# Altium PCB MainBoard.PcbDoc
Units mil, origin at the board's own origin, x right, y up, seen from the top; angles counter-clockwise.
Board outline 1968.5 x 3937.01 mil, 2 copper layers (Top Layer, Bottom Layer); 49 components, 51 nets, 265 pads, 104 vias.
Unrouted connection lines stored in the file: 41.
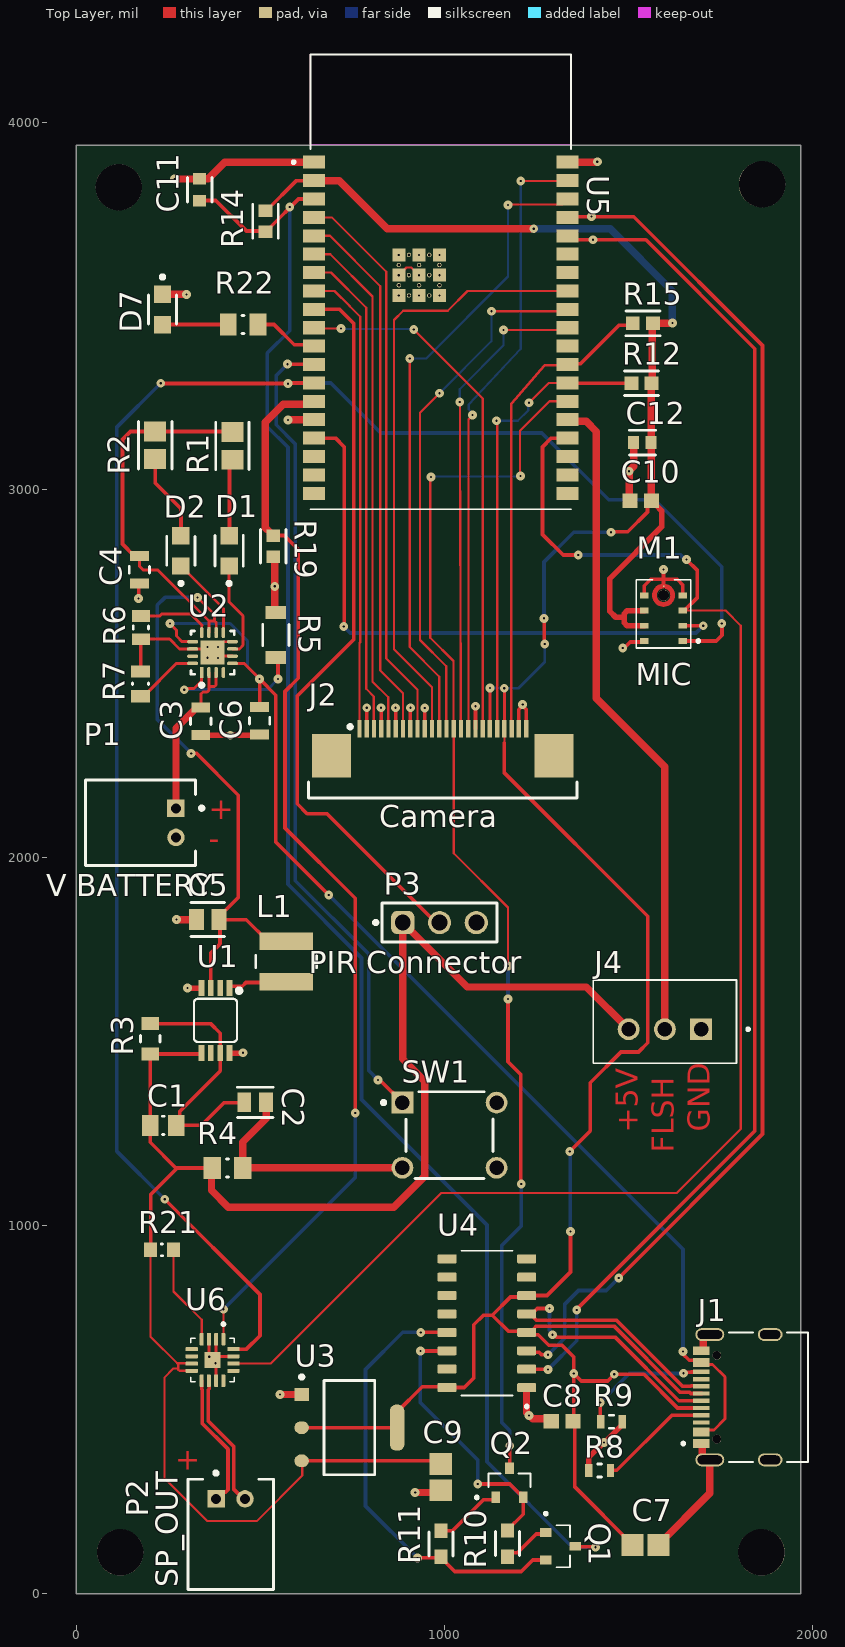
[diagram p0: Top Layer view]
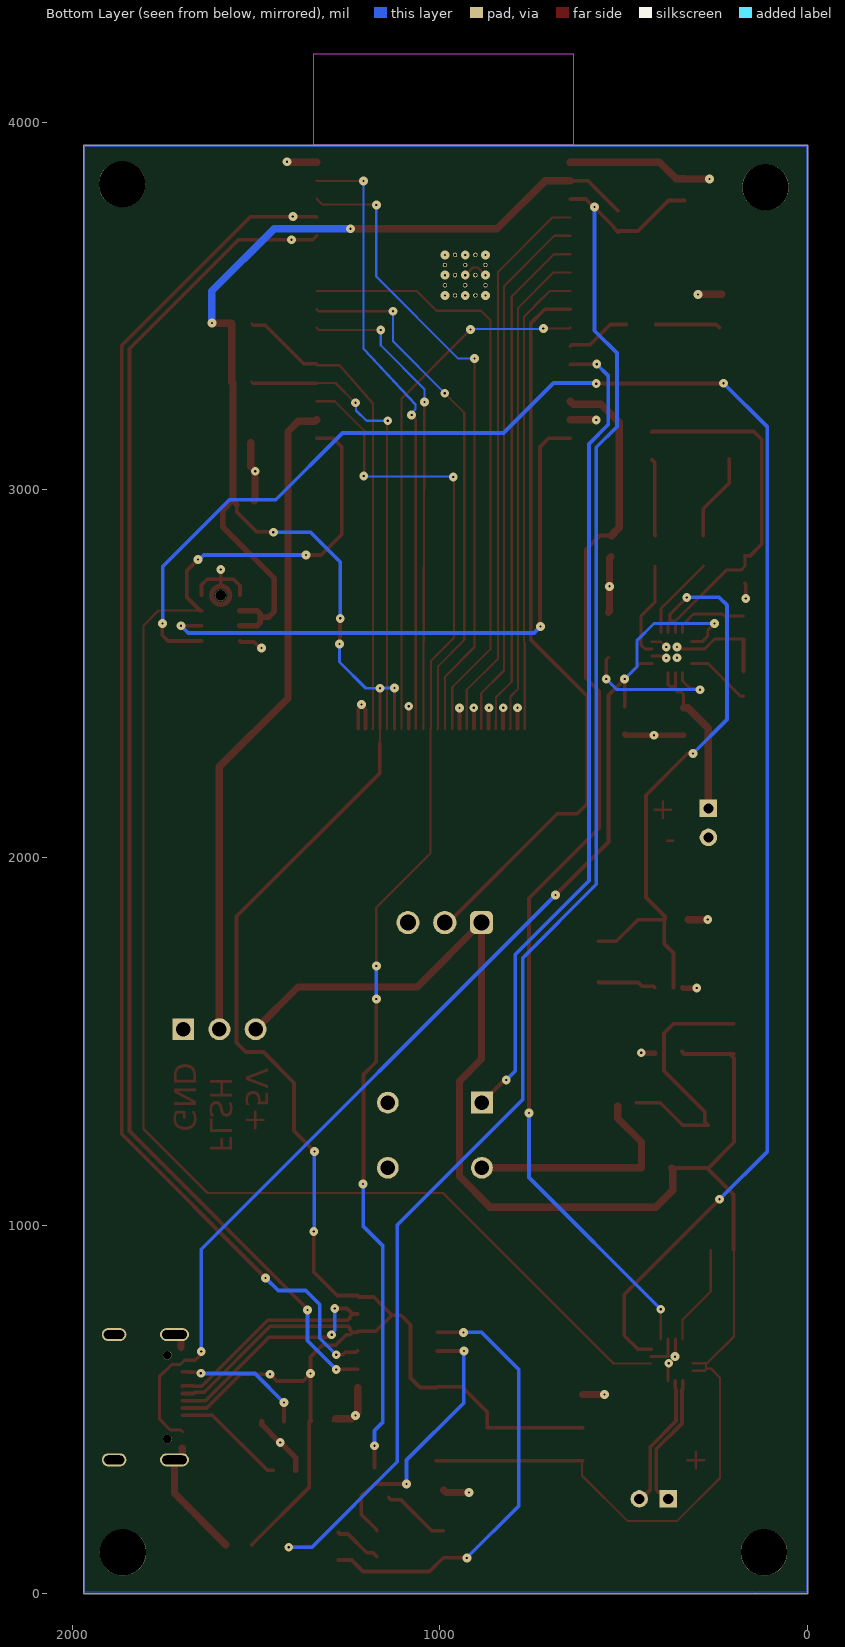
[diagram p1: Bottom Layer view, seen from below]
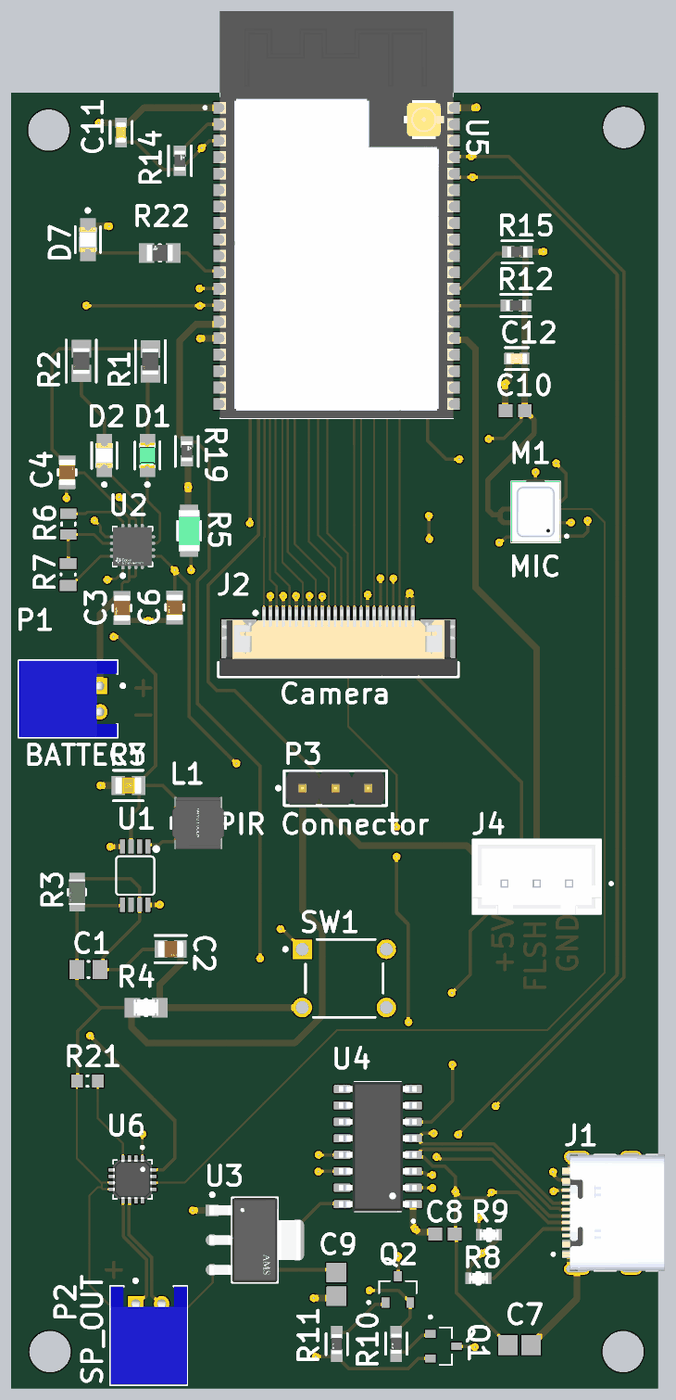
[diagram p2: 3D render of the assembled board from above, using the file's embedded part models]

## Layer stack, top to bottom
Top Solder: solder mask 0.4, Solder Resist, Dk 3.5
Top Layer: signal copper 1.4
Dielectric 1: dielectric 12.6, FR-4, Dk 4.8
Bottom Layer: signal copper 1.4
Bottom Solder: solder mask 0.4, Solder Resist, Dk 3.5

## Board outline
0,0 1968.5,0 1968.5,3937.01 0,3937.01

## Design rules (kind name [scope] priority, off if disabled: settings)
Clearance [All] p1: gap=3.5 ignorepadtopadclearanceinfootprint=FALSE
DiffPairsRouting [All] p1: maxlimit=10 minlimit=6 mostfreqgap=6 toplayer_minwidth=8 toplayer_maxwidth=15 toplayer_prefwidth=12 bottomlayer_minwidth=8 bottomlayer_maxwidth=15 bottomlayer_prefwidth=12 maxuncoupledlength=500
HoleSize [All] p1: absolutevalues=TRUE maxlimit=200 minlimit=1 maxpercent=80.000 minpercent=20.000
MatchedLengths USB_Match [InNetClass('USB_Data')] p1: tolerance=10 checknetsindiffpair=TRUE checkdiffpairvsdiffpair=FALSE checkxsignals=FALSE checkothers=FALSE
MinimumSolderMaskSliver [All] p1: minsoldermaskwidth=0
NetAntennae [All] p1: netantennaetolerance=200
PolygonConnect Mounting_Holes_Direct [IsVia AND (HoleSize > 100)] p1: connectstyle=Direct reliefconductorwidth=10 reliefentries=4 polygonreliefangle="90 Angle" airgapwidth=10
PolygonConnect [All] p2: connectstyle=Relief reliefconductorwidth=10 reliefentries=4 polygonreliefangle="90 Angle" airgapwidth=10
RoutingVias [All] p1: holewidth=28 width=50 viastyle="Through Hole" minholewidth=28 minwidth=50 maxholewidth=28 maxwidth=50
SilkToSilkClearance [All] p1: silktosilkclearance=6
SilkToSolderMaskClearance [IsPad] p1: minsilkscreentomaskgap=5 clearancetoexposedcopper=TRUE
SolderMaskExpansion [All] p1: expansion=4 istentingtop=FALSE
SupplyNets "Schematic Supply Nets" [InNet('GND')] p1: voltage=0.000
Width [All] p1: maxlimit=20 minlimit=5 preferedwidth=10 minimp=50.000000 maximp=50.000000 favimp=50.000000
24 further rules are at their usual default settings.

## Classes and differential pairs
component class Doorbellv1.3: D7 M1 P2 P3 R21 R22 SW1 U6
component class Doorbellv1.2: C10 C11 C12 J2 J4 R12 R14 R15 R19 U5
component class Doorbellv1.1: C1 C2 C3 C4 C5 C6 C7 C8 C9 D1 D2 J1 L1 P1 Q1 Q2 R1 R2 R3 R4 R5 R6 R7 R8 R9 R10 R11 U1 U2 U3 U4
differential pair OUT: +OUT_P -OUT_N
differential pair USB: +USB_P -USB_N

## Components (designator, comment, footprint, x,y, rotation, side; value= is the part's Value field where it differs from the comment)
C1 "22pF 50V" CAPC0805(2012)145_N 236,1273 r180 top value=22pF
C2 "22uF 10V" FP-C0805C226M8PACTU-MFG 486,1335 r0 top
C3 "4.7uF 16V" FP-GRM21B-0_15-MFG 338,2371 r270 top
C4 "4.7uF 16V" FP-GRM21B-0_15-MFG 171,2783.4 r90 top
C5 "10uf 10V" FP-C0805X106K8RACAUTO-MFG 357,1832 r180 top
C6 "4.7uF 16V" FP-GRM21B-0_15-MFG 498,2373 r270 top
C7 "10uF" CAPC2013X140X50ML20T25 1547,132 r180 top
C8 "100nF" CAPC1608X90X35NL15T15 1320,469 r0 top
C9 "10uF" CAPC2013X140X50ML20T25 990,316.57 r90 top
C10 "0.1uF" CAPC1608X90X35NL15T15 1534,2971 r180 top
C11 "1uF" FP-CC0603-DA-MFG 335,3816 r90 top value="1 uF"
C12 "10uF" FP-C0603C106M8PACTU-MFG 1538.38,3129 r180 top
D1 "Green LED" FP-APHCM2012CGCK-F01-MFG 415,2834.66 r90 top
D2 "Red LED" FP-LS_R976-MFG 284,2834.66 r90 top
D7 "RED" FP-LS_R976-MFG 234,3490.34 r270 top
J1 "TYPE-C" HRO_TYPE-C-31-M-12 1885.88,533.78 r90 top
J2 "Camera" 68712414522 996,2250 r0 top
J4 "3-Pin Header" JST_B3B-XH-A 1599.57,1554.67 r0 top
L1 "2.2uH" FP-NR4018-MFG 570,1718 r270 top
M1 "MIC" MIC_INMP441ACEZ-R7 1596,2663 r270 top
P1 "3.7 V BATTERY" JST-S2B-PH-K-S_V 174,2095 r270 top
P2 "SP_OUT" JST-S2B-PH-K-S_V 419,161 r0 top
P3 "PIR Connector" 61300311121 987,1824 r0 top
Q1 "NPN" TRANS_SS8050-G 1315.76,128.6 r0 top
Q2 "NPN" TRANS_SS8050-G 1177,301 r90 top
R1 "1k" FP-TFCR0805-IPC_A 424,3120 r90 top
R2 "1k" FP-TFCR0805-IPC_A 214,3121.45 r90 top
R3 "750k" FP-AC0805-MFG 201,1508 r270 top value=750KΩ
R4 "100k" FP-CRCW0805-e3-IPC_A 411,1157 r180 top
R5 "10k" FP-RN732B-MFG 542,2606 r90 top
R6 "1.18k" RESC2013X60X35LL10T20 175,2626 r90 top
R7 "1.13k" RESC0805(2012)_L 174,2473 r270 top value="1130.00 Ohm"
R8 "5.1k" FP-CRCW0603-C-MFG 1422,335 r0 top
R9 "5.1k" FP-CRCW0603-C-MFG 1454.47,467 r180 top
R10 "10k" FP-CPF0603-MFG 1172,136 r90 top value=10KΩ
R11 "10k" FP-CPF0603-MFG 991,135 r90 top value=10KΩ
R12 "4.7k" FP-TFCR0603-IPC_B 1536,3290 r180 top
R14 "10k" FP-MCT0603-IPC_B 514,3730 r90 top
R15 "4.7k" FP-TFCR0603-IPC_B 1540,3453 r180 top
R19 "10k" FP-MCT0603-IPC_B 535,2847 r90 top
R21 "100k" RESC0603(1608)_N 232.5,934 r180 top value="100000.00 Ohm"
R22 "1k" FP-MCU0805-IPC_A 453,3450 r180 top
SW1 "B3F-1000" OMRON-B3F-1000-4_V 1014,1246 r0 top
U1 "PAM2401" MSOP8 378,1558 r180 top
U2 "BQ24075TRGTR" FP-RGT0016C-IPC_C 370,2558 r90 top
U3 "AMS1117-3.3" FP-AMS1117-IPC_C 742,451 r0 top
U4 "CH340C" SOIC127P600X180-16N 1115.73,735 r180 top
U5 "ESP32-WROVER-E-N4R8" XCVR_ESP32-WROVER-E-N4R8 990.51,3565.8 r0 top
U6 "MAX98357AETE+T" QFN50P300X300X80-17N 370,635 r270 top

## Footprints (in the part's own frame and the unit in brackets; to place one, negate y for a bottom-side part, rotate by r counter-clockwise, add the part's x,y. Pads: shape width x height; smd on the part's side, far side on the other; paste and mask are expansions set on the pad)
61300311121 [mm] "Pin Header, pitch 2.54 mm, THT, Vertical, single row, 3p"
  rrect50% 1.6x1.6 hole 1.1: 1(-2.54,0)
  round 1.6 hole 1.1: 2(0,0) 3(2.54,0)
  silkscreen extent -4.53,-1.35 3.96,1.35, body extent -3.81,-1.27 3.81,1.27, height 8.57
68712414522 [mm] "ZIF Connectors, Horizontal, Bottom Contact, pitch 0.5mm, 24p"
  rect 0.3x1.2 smd: 1(-5.75,2.56) 2(-5.25,2.56) 3(-4.75,2.56) 4(-4.25,2.56) 5(-3.75,2.56) 6(-3.25,2.56) 7(-2.75,2.56) 8(-2.25,2.56) 9(-1.75,2.56) 10(-1.25,2.56) 11(-0.75,2.56) 12(-0.25,2.56) 13(0.25,2.56) 14(0.75,2.56) 15(1.25,2.56) 16(1.75,2.56) 17(2.25,2.56) 18(2.75,2.56) 19(3.25,2.56) 20(3.75,2.56) 21(4.25,2.56) 22(4.75,2.56) 23(5.25,2.56) 24(5.75,2.56)
  rect 2.7x3 smd: M1(-7.68,0.7) M2(7.68,0.7)
  silkscreen extent -9.27,-2.22 9.28,2.82, body extent -9.2,-2.15 9.2,2.95, height 2.1
CAPC0805(2012)145_N [mm] "Chip Capacitor, Body 2.0x1.2mm, Height 1.45mm, IPC Medium Density"
  rect 1.15x1.45 smd: 1(-0.9,0) 2(0.9,0)
  silkscreen extent -0.05,-0.62 0.05,0.63, body extent -1.1,-0.72 1.1,0.73, height 1.45
CAPC1608X90X35NL15T15 [mm] "Chip Capacitor, 2-Leads, Body 1.60x0.81mm, IPC Medium Density"
  rect 1.05x1 smd: 1(-0.75,0) 2(0.75,0)
  body extent -0.88,-0.48 0.87,0.48, height 0.9
CAPC2013X140X50ML20T25 [mm] "Chip Capacitor, 2-Leads, Body 2.00x1.25mm, IPC Low Density"
  rect 1.5x1.55 smd: 1(-0.9,0) 2(0.9,0)
  body extent -1.1,-0.72 1.1,0.72, height 1.4
FP-AC0805-MFG [mm]
  rect 0.9x1.2 smd paste+0 mask+0: 1(-1.05,0) 2(1.05,0)
  silkscreen extent -0.23,-0.67 0.23,0.67, body extent -1.6,-0.77 1.6,0.77, height 0.25
FP-AMS1117-IPC_C [mm]
  rect 1.004x0.872 smd paste+0 mask+0: 1(-3.295,2.29)
  rrect100% 1.004x0.872 smd paste+0 mask+0: 2(-3.295,0) 3(-3.295,-2.29)
  rrect87% 1.004x3.182 smd paste+0 mask+0: 4(3.295,0)
  silkscreen extent -3.42,-3.25 1.75,3.62, body extent -3.9,-3.35 3.9,3.35, height 0.25
FP-APHCM2012CGCK-F01-MFG [mm]
  rect 1.2x1.2 smd paste+0 mask+0: 1(-1.05,0) 2(1.05,0)
  silkscreen extent -2.37,-0.97 1.05,0.97, body extent -1.75,-0.77 1.75,0.77, height 0.25
FP-C0603C106M8PACTU-MFG [mm]
  rect 0.75x0.9 smd paste+0 mask+0: 1(-0.6,0) 2(0.6,0)
  silkscreen extent -0.9,-0.85 0.9,0.85, body extent -1.2,-0.6 1.2,0.6, height 0.25
FP-C0805C226M8PACTU-MFG [mm]
  rect 0.95x1.35 smd paste+0 mask+0: 1(-0.75,0) 2(0.75,0)
  silkscreen extent -1.22,-1.05 1.22,1.05, body extent -1.4,-0.85 1.4,0.85, height 0.25
FP-C0805X106K8RACAUTO-MFG [mm]
  rect 1.04x1.46 smd paste+0 mask+0: 1(-0.79,0) 2(0.79,0)
  silkscreen extent -1.15,-1.17 1.15,1.17, body extent -1.41,-0.87 1.41,0.87, height 0.25
FP-CC0603-DA-MFG [mm]
  rect 0.8x0.9 smd paste+0 mask+0: 1(-0.75,0) 2(0.75,0)
  silkscreen extent -0.85,-0.85 0.85,0.85, body extent -1.35,-0.75 1.35,0.75, height 0.25
FP-CPF0603-MFG [mm]
  rect 1x0.9 smd paste+0 mask+0: 1(-0.9,0) 2(0.9,0)
  silkscreen extent -0.82,-0.82 0.82,0.82, body extent -1.5,-0.55 1.5,0.55, height 0.25
FP-CRCW0603-C-MFG [mm]
  rect 0.5x0.9 smd paste+0 mask+0: 1(-0.75,0) 2(0.75,0)
  silkscreen extent -0.13,-0.45 0.13,0.45, body extent -1.1,-0.55 1.1,0.55, height 0.25
FP-CRCW0805-e3-IPC_A [mil]
  rect 47.5x59.38 smd paste+0 mask+0: 1(-41.37,0) 2(41.37,0)
  silkscreen extent -3,-25 3,25, body extent -85,-49 85,49, height 10
FP-GRM21B-0_15-MFG [mm]
  rect 0.7x1.3 smd paste+0 mask+0: 1(-0.95,0) 2(0.95,0)
  silkscreen extent -0.23,-0.7 0.23,0.7, body extent -1.4,-0.8 1.4,0.8, height 0.25
FP-LS_R976-MFG [mm]
  rect 1.2x1.2 smd paste+0 mask+0: 1(-1.05,0) 2(1.05,0)
  silkscreen extent -2.37,-0.97 1,0.97, body extent -1.75,-0.8 1.75,0.8, height 0.25
FP-MCT0603-IPC_B [mil]
  rect 34x37.88 smd paste+0 mask+0: 1(-28.72,0) 2(28.72,0)
  silkscreen extent -46,-35 46,35, body extent -56,-29 56,29, height 10
FP-MCU0805-IPC_A [mil]
  rect 45.62x59.38 smd paste+0 mask+0: 1(-40.42,0) 2(40.42,0)
  silkscreen extent -3,-25 3,25, body extent -83,-49 83,49, height 10
FP-NR4018-MFG [mm]
  rect 1.2x3.7 smd paste+0 mask+0: 1(-1.4,0) 2(1.4,0)
  silkscreen extent -0.43,-2.1 0.43,2.1, body extent -2.2,-2.2 2.2,2.2, height 0.25
FP-RGT0016C-IPC_C [mm]
  rect 0.766x0.239 smd paste+0 mask+0: 1(-1.373,0.75)
  rrect100% 0.766x0.239 smd paste+0 mask+0: 2(-1.373,0.25) 3(-1.373,-0.25) 4(-1.373,-0.75) 9(1.373,-0.75) 10(1.373,-0.25) 11(1.373,0.25) 12(1.373,0.75)
  rrect100% 0.239x0.766 smd paste+0 mask+0: 5(-0.75,-1.373) 6(-0.25,-1.373) 7(0.25,-1.373) 8(0.75,-1.373) 13(0.75,1.373) 14(0.25,1.373) 15(-0.25,1.373) 16(-0.75,1.373)
  rect 1.68x1.68 smd paste-1000 mask+0: 17(0,0)
  silkscreen extent -2.37,-1.5 1.5,1.5, body extent -1.86,-1.86 1.86,1.86, height 0.25
FP-RN732B-MFG [mm]
  rect 0.9x1.4 smd paste+0 mask+0: 1(-1.55,0) 2(1.55,0)
  silkscreen extent -0.72,-0.9 0.72,0.9, body extent -2.1,-1 2.1,1, height 0.25
FP-TFCR0603-IPC_B [mil]
  rect 37.72x35.91 smd paste+0 mask+0: 1(-27.64,0) 2(27.64,0)
  silkscreen extent -46,-34 46,34, body extent -56,-28 56,28, height 10
FP-TFCR0805-IPC_A [mil]
  rect 53.38x59.38 smd paste+0 mask+0: 1(-37.45,0) 2(37.45,0)
  silkscreen extent -64,-45 64,45, body extent -84,-49 84,49, height 10
HRO_TYPE-C-31-M-12 [mm]
  rect 0.6x1.14 smd mask+0.05: A1_B12(-3.2,4.75) A4_B9(-2.4,4.75) B1_A12(3.2,4.75) B4_A9(2.4,4.75)
  rect 0.3x1.14 smd mask+0.05: A5(-1.25,4.75) A6(-0.25,4.75) A7(0.25,4.75) A8(1.25,4.75) B5(1.75,4.75) B6(0.75,4.75) B7(-0.75,4.75) B8(-1.75,4.75)
  oval 0.9x2 hole 0.6 slot 1.7 at 90 deg: S1(-4.325,4.17) S2(4.325,4.17)
  oval 0.9x1.7 hole 0.6 slot 1.4 at 90 deg: S3(-4.325,0) S4(4.325,0)
  round 0.6 hole 0.6 unplated: ""(-2.89,3.68) ""(2.89,3.68)
  silkscreen extent -4.47,-2.6 4.47,6.1, body extent -4.47,-2.6 4.47,5.31, height 3.31
JST-S2B-PH-K-S_V [mm] "THD, 2-Leads, Body 7.6x5.9mm, Pitch 2mm"
  rect 1.2x1.2 hole 0.7: 1(-1,2.45)
  round 1.2 hole 0.7: 2(1,2.45)
  silkscreen extent -2.95,-3.8 2.95,4.35, body extent -2.95,-3.8 2.95,3.8, height 4.8
JST_B3B-XH-A [mm]
  rect 1.508x1.508 / inner round 1.508 / far side rect 1.508x1.508 hole 1: 1(2.5,-0.525)
  round 1.508 hole 1: 2(0,-0.525) 3(-2.5,-0.525)
  silkscreen extent -4.95,-2.88 5.85,2.88, body extent -4.95,-2.88 4.95,2.88, height 7
MIC_INMP441ACEZ-R7 [mm]
  rect 0.4x0.6 smd paste-0.025: 1(1.87,1.33) 2(0.82,1.33) 3(-0.23,1.33) 4(-1.28,1.33) 6(-1.28,-1.33) 7(-0.23,-1.33) 8(0.82,-1.33) 9(1.87,-1.33)
  rect 0.1x0.1 smd paste-1 mask+0: 5(-1.92,0)
  round 0.75 hole 0.75 unplated mask+0.505: ""(-1.29,0)
  Top Layer region: 244 vertices and 0 holes, not listed, extent -2.07,-0.78 -0.51,0.78
  silkscreen extent -2.36,-1.88 2.36,2.5, body extent -2.36,-1.88 2.36,1.88, height 1.05
MSOP8 [mm]
  rect 0.4x1.1 smd: 1(-0.975,-2.25) 2(-0.325,-2.25) 3(0.325,-2.25) 4(0.975,-2.25) 5(0.975,2.25) 6(0.325,2.25) 7(-0.325,2.25) 8(-0.975,2.25)
  silkscreen extent -1.72,-2.15 1.48,1.48
OMRON-B3F-1000-4_V [mm] "TH, 4-Leads, Body 6x6mm"
  rect 1.5x1.5 hole 1 paste-2539.97: 1(-3.25,2.25)
  round 1.5 hole 1 paste-2539.97: 2(3.25,2.25) 4(3.25,-2.25)
  round 1.5 hole 1 paste-2539.97 mask+0.102: 3(-3.25,-2.25)
  silkscreen extent -4.67,-3 3,3, body extent -3,-3 3,3, height 4.5
QFN50P300X300X80-17N [mm]
  rrect25% 0.84x0.27 smd: 1(-1.435,0.75) 2(-1.435,0.25) 3(-1.435,-0.25) 4(-1.435,-0.75) 9(1.435,-0.75) 10(1.435,-0.25) 11(1.435,0.25) 12(1.435,0.75)
  rrect25% 0.27x0.84 smd: 5(-0.75,-1.435) 6(-0.25,-1.435) 7(0.25,-1.435) 8(0.75,-1.435) 13(0.75,1.435) 14(0.25,1.435) 15(-0.25,1.435) 16(-0.75,1.435)
  rect 1.1x1.1 smd paste-0.2: 17(0,0)
  silkscreen extent -2.57,-1.5 1.5,1.5, body extent -1.5,-1.5 1.5,1.5, height 0.9
RESC0603(1608)_N [mm] "Chip Resistor, Body 1.6x0.8mm, IPC Medium Density"
  rect 0.9x1 smd: 1(-0.8,0) 2(0.8,0)
  silkscreen extent -0.05,-0.4 0.05,0.4, body extent -0.85,-0.47 0.85,0.47, height 0.6
RESC0805(2012)_L [mm] "Chip Resistor, Body 2.0x1.3mm, IPC High Density"
  rect 0.85x1.3 smd: 1(-0.85,0) 2(0.85,0)
  silkscreen extent -0.05,-0.55 0.05,0.55, body extent -1.1,-0.67 1.1,0.68, height 0.7
RESC2013X60X35LL10T20 [mm] "Chip Resistor, 2-Leads, Body 2.00x1.25mm, IPC High Density"
  rect 0.8x1.25 smd: 1(-0.8,0) 2(0.8,0)
  silkscreen extent -0.1,-0.53 0.1,0.53, body extent -1.05,-0.67 1.05,0.67, height 0.6
SOIC127P600X180-16N [mm]
  rrect25% 1.31x0.62 smd: 1(-2.75,4.445) 2(-2.75,3.175) 3(-2.75,1.905) 4(-2.75,0.635) 5(-2.75,-0.635) 6(-2.75,-1.905) 7(-2.75,-3.175) 8(-2.75,-4.445) 9(2.75,-4.445) 10(2.75,-3.175) 11(2.75,-1.905) 12(2.75,-0.635) 13(2.75,0.635) 14(2.75,1.905) 15(2.75,3.175) 16(2.75,4.445)
  silkscreen extent -2.85,-5 1.78,5.85, body extent -3,-5 3,5, height 1.8
TRANS_SS8050-G [mm]
  rect 0.8x0.6 smd: 1(-1.01,0.95) 2(-1.01,-0.95) 3(1.01,0)
  silkscreen extent -1.11,-1.45 0.65,2.35
XCVR_ESP32-WROVER-E-N4R8 [mm]
  rect 1.5x0.9 smd: 1(-8.75,8.26) 2(-8.75,6.99) 3(-8.75,5.72) 4(-8.75,4.45) 5(-8.75,3.18) 6(-8.75,1.91) 7(-8.75,0.64) 8(-8.75,-0.63) 9(-8.75,-1.9) 10(-8.75,-3.17) 11(-8.75,-4.44) 12(-8.75,-5.71) 13(-8.75,-6.98) 14(-8.75,-8.25) 15(-8.75,-9.52) 16(-8.75,-10.79) 17(-8.75,-12.06) 18(-8.75,-13.33) 19(-8.75,-14.6) 20(8.75,-14.6) 21(8.75,-13.33) 22(8.75,-12.06) 23(8.75,-10.79) 24(8.75,-9.52) 25(8.75,-8.25) 26(8.75,-6.98) 27(8.75,-5.71) 28(8.75,-4.44) 29(8.75,-3.17) 30(8.75,-1.9) 31(8.75,-0.63) 32(8.75,0.64) 33(8.75,1.91) 34(8.75,3.18) 35(8.75,4.45) 36(8.75,5.72) 37(8.75,6.99) 38(8.75,8.26)
  rect 0.9x0.9 smd: 39_1(-2.9,1.86) 39_2(-1.5,1.86) 39_3(-0.1,1.86) 39_4(-2.9,0.46) 39_5(-1.5,0.46) 39_6(-0.1,0.46) 39_7(-2.9,-0.94) 39_8(-1.5,-0.94) 39_9(-0.1,-0.94)
  round 0.3 hole 0.2 mask+0: 40(-2.2,1.86) 41(-0.8,1.86) 42(-2.9,1.16) 43(-1.5,1.16) 44(-0.1,1.16) 45(-2.2,0.46) 46(-0.8,0.46) 47(-2.9,-0.24) 48(-1.5,-0.24) 49(-0.1,-0.24) 50(-2.2,-0.94) 51(-0.8,-0.94)
  Keep-Out Layer region: 9,9.48 -9,9.48 -9,15.7 9,15.7
  silkscreen extent -10.26,-15.7 9,15.7, body extent -9,-15.7 9,15.7, height 3.45

## Part data
C1: library part CMP-1036-01235-1, "CAP 22pF 50V ±1% 0805 (2012 Metric) Thickness 1.45mm SMD", Case-EIA=0805, Case-Metric=2012, Rated Voltage="50 V", Tolerance=Â±1%, Max Thickness="1.45 mm", Technology=SMT
C2: library part CMP-03020-034697-1, "CAP CER 22UF 10V X5R 0805", Capacitance=22uF, Case Code (Imperial)=0805, Case Code (Metric)=2012, Dielectric=X5R, Dielectric Material=Ceramic, Max Operating Temperature=85°C, Min Operating Temperature=-55°C, Tolerance=20%, Voltage=10V, Case/Package=0805, Depth=1.25mm, Dissipation Factor=10%, Height=1.25mm, Lead Free="Lead Free", Length=0.079inch, Mount="Surface Mount", Packaging="Tape and Reel", RoHS Compliant=Yes, Termination=Solder, Thickness=0.055inch, Voltage Rating=10V, Voltage Rating (DC)=10V, Width=0.049inch
C3 C4 C6: library part CMP-06035-032042-1, "Chip Multilayer Ceramic Capacitors for General Purpose, 0805, 4.7uF, X7R, 15%, 20%, 16V", Capacitance=4.7uF, Case/Package=0805, Dielectric=X7R, Tolerance=20%, Voltage Rating (DC)=16V, Length=2mm, Thickness=1.25mm, Width=1.25mm
C5: library part CMP-03020-034694-1, Capacitance=10uF, Case Code (Imperial)=0805, Case Code (Metric)=2012, Max Operating Temperature=125°C, Min Operating Temperature=-55°C, Ratings=AEC-Q200, Tolerance=10%, Voltage Rating=10V, Case/Package=0805, Features="Soft Termination", Mount="Surface Mount", Packaging="Cut Tape", RoHS Compliant=Yes
C7 C9: library part CMP-2007-04644-1, Manufacturer="AVX Interconnect / Elco", Part Number=08056D106KAT4A
C8: library part CMP-2006-04392-1, Manufacturer="AVX Interconnect / Elco", Part Number=06035C104MAT2A
C10: library part CMP-2006-02299-1, Manufacturer=Kemet, Part Number=C0603C104K4RAC7013
C11: library part CMP-03422-000857-1, "CAP CER 1UF 25V X5R 0603", Capacitance="1 uF", Manufacturer=YAGEO, Manufacturer Part Number=CC0603MRX5R8BB105, Package=CC0603-DA, Temperature="-55°C to +125°C", Temperature Characteristic=X5R, Temperature Coefficient=15%, Temperature Range High=+125°C, Temperature Range Low=-55°C, Tolerance=0.2, Voltage="25 V", Automotive=No, Category=Cap, ComponentLink2Description=Datasheet, ComponentLink2URL=http://www.yageo.com/documents/recent/UPY-GPHC_X7R_6.3V-to-50V_18.pdf, Device Class L1="Passive Components", Device Class L2=Capacitors, Device Class L3="Ceramic Capacitors", Digikey Description="CAP CER 1UF 25V X5R 0603", Footprint Url=http://www.yageo.com/exep/pages/download/literatures/UPY-C_GEN_24.pdf, Height=0.9mm, Lead Free=Yes, Material=Ceramic, Octopart=https://octopart.com/cc0603mrx5r8bb105-yageo-57080766, RoHS=TRUE, Voltage Rating="25 V"
C12: library part CMP-03020-034654-1, "CAP CER 10UF 10V X5R 0603", RoHS Compliant=Yes
D1: library part CMP-44529-000062-1, "LED GREEN CLEAR CHIP SMD", Case Code (Imperial)=0805, Case Code (Metric)=2012, Color=Green, Forward Current=20mA, Forward Voltage=2.1V, Lens Color=Clear, Max Operating Temperature=85°C, Min Operating Temperature=-40°C, Package Quantity=1, Case/Package=0805, Dominant Wavelength=570nm, Height=0.4mm, Illumination Color=Green, Lead Free="Lead Free", Length=2mm, Lens Style=Clear, Luminous Intensity=40mcd, Mount="Surface Mount", Number of LEDs=1, Number of Pins=2, Packaging="Tape and Reel", RoHS Compliant=Yes, Series=APHCM, Test Current=20mA, Viewing Angle=110°, Wavelength=570nm, Width=1.25mm
D2 D7: library part CMP-62016-000037-1, "LED RED DIFFUSED 0805 SMD", Case Code (Imperial)=0805, Case Code (Metric)=2012, Color=Red, Forward Current=25mA, Forward Voltage=2.5V, Lens Color=White, Max Operating Temperature=85°C, Min Operating Temperature=-30°C, Package Quantity=16000, Power Dissipation=65W, Reverse Voltage=12V, Test Current=20mA, Case/Package=0805, Depth=1.35mm, Dominant Wavelength=633nm, Height=0.9mm, Illumination Color=Red, Length=2mm, Lens Size=1.25mm, Lens Style=Flat, Lens Transparency=Diffused, Luminous Flux=0.47lm, Luminous Intensity=180mcd, Mount="Surface Mount", Number of Elements=1, Number of LEDs=1, Number of Pins=2, Packaging="Tape and Reel", Radiation Hardening=No, Viewing Angle=160°, Width=1.25mm
J1: library part TYPE-C-31-M-12, "USB Connectors 24 Receptacle 1 8.94*7.3mm RoHS", Package=Package, Check_prices=https://www.snapeda.com/parts/TYPE-C-31-M-12/HRO+Electronics+Co.%252C+Ltd./view-part/?ref=eda, MF="HRO Electronics Co., Ltd.", MP=TYPE-C-31-M-12, SnapEDA_Link=https://www.snapeda.com/parts/TYPE-C-31-M-12/HRO+Electronics+Co.%252C+Ltd./view-part/?ref=snap
J2: library part CMP-1502-01537-3, "Ffc/fpc Conn, R/a Rcpt, 24POS, 1ROW, SMT Rohs Compliant: Yes", Contact Resistance=20mΩ, Current Rating=500mA, Flammability Rating="UL94 V-0", Insulation Resistance=100MΩ, Max Operating Temperature=85°C, Min Operating Temperature=-25°C, Operating Supply Voltage=50V, Actuator Material="Liquid Crystal Polymer, Polymer", Contact Location=Top, Contact Material="Bronze, Tin", Contact Plating=Tin, Gender=Receptacle, Housing Material="Liquid Crystal Polymer", Lead Pitch=500µm, Length=12.6mm, Mount="Surface Mount", Number of Contacts=24, Number of Pins=24, Number of Positions=24, Number of Rows=1, Orientation=Horizontal, Packaging="Tape and Reel", Pitch=500µm, REACH SVHC=Unknown, RoHS=Compliant, Termination=SMD/SMT, Voltage Rating=50V, Width=2.1mm
J4: library part B3B-XH-A, "Connector Header Through Hole 3 position 0.098 (2.50mm)", Package=None, Check_prices=https://www.snapeda.com/parts/B3B-XH-A/JST+Sales+America+Inc./view-part/?ref=eda, MF="JST Sales", MP=B3B-XH-A, SnapEDA_Link=https://www.snapeda.com/parts/B3B-XH-A/JST+Sales+America+Inc./view-part/?ref=snap
L1: library part CMP-14484-000071-2, "SMD Power Inductors 2.2uH ±20% 2.2A 50.4mΩ", Case/Package=Nonstandard, Current Rating=2.2A, DC Resistance (DCR)=50.4mR, Inductance Tolerance=20%, Max DC Current=3A, Max Operating Temperature=125°C, Min Operating Temperature=-25°C, Package Quantity=3500, Resistor Type=Wirewound, Self Resonant Frequency=60MHz, Test Frequency=100kHz, Core Material=Ferrite, Depth=4.2mm, Halogen Free="Halogen Free", Height=1.8mm, Height - Seated (Max)=0.071inch, Inductance=2.2uH, Lead Free="Lead Free", Lead Pitch=2.8mm, Length=4mm, Mount="Surface Mount", Number of Pins=2, Packaging="Tape and Reel", Radiation Hardening=No, RMS Current (Irms)=2.2A, RoHS Compliant=Yes, Saturation Current=3A, Series=NRS, Shielding=Shielded, Termination=SMD/SMT, Tolerance=20%, Width=0.157inch
M1: library part INMP441ACEZ-R7, "60 Hz ~ 15 kHz Digital, I2S Microphone MEMS (Silicon) 1.62 V ~ 3.63 V Omnidirectional (-26dB Â±3dB @ 94dB SPL) Solder Pads", Package="LGA-9 TDK InvenSense", Check_prices=https://www.snapeda.com/parts/INMP441ACEZ-R7/TDK/view-part/?ref=eda, MF="TDK InvenSense", MP=INMP441ACEZ-R7, SnapEDA_Link=https://www.snapeda.com/parts/INMP441ACEZ-R7/TDK/view-part/?ref=snap
P1 P2: library part CMP-1755-00004-1, "Male Header, Pitch 2 mm, 1 x 2 Position, Height 4.8 mm, Tail Length 3.4 mm, -25 to 85 degC, RoHS, Bulk", Capacitance="10 uF", Case\Package=Radial, Max Operating Temperature="85 degC", Min Operating Temperature="-40 degC", Package Quantity=200, Tolerance=20%, Voltage Rating="50 V", ComponentLink1Description=Datasheet, ComponentLink1URL=http://www.jst-mfg.com/product/pdf/eng/ePH.pdf, DatasheetVersion=Dec-12, Diameter="5 mm", Height="11 mm", Lead Pitch="2 mm", Length="11 mm", Mount="Through Hole", PackageDescription="Male Header, Pitch 2 mm, 1 x 2 Position, Height 4.8 mm, Tail Length 3.4 mm", PackageReference=S2B-PH-K-S, Packaging=Bulk, Pins=2, Radiation Hardening=No, REACH SVHC="No SVHC", RoHSCompliant=true, Voltage Rating (DC)="50 V"
P3: library part CMP-1502-01062-4, "THT Vertical Pin Header WR-PHD, Pitch 2.54 mm, Single Row, 3 pins", Color=Black, Contact Resistance=20mΩ, Current Rating=3A, Max Operating Temperature=105°C, Min Operating Temperature=-40°C, Operating Supply Voltage=250V, Connector Type="Male Pin", Contact Material=Gold, Contact Mating Length=5.9944mm, Contact Plating=Gold, Gender=Male, Height=8.94mm, Lead Free="Lead Free", Lead Pitch=2.54mm, Mount="Through Hole", Number of Contacts=3, Number of Pins=3, Number of Positions=3, Number of Rows=1, Orientation=Vertical, Packaging=Bulk, Pitch=2.54mm, RoHS=Compliant, Termination=Solder, Voltage Rating=250V
Q1 Q2: library part SS8050-G, "Bipolar (BJT) Transistor NPN 25 V 1.5 A 100MHz 300 mW Surface Mount SOT-23-3", Package=None, Check_prices=https://www.snapeda.com/parts/SS8050G/Comchip/view-part/?ref=eda, Digi-Key_Part_Number=641-1790-2-ND, MF=Comchip, MP=SS8050G, SnapEDA_Link=https://www.snapeda.com/parts/SS8050G/Comchip/view-part/?ref=snap
R1 R2: library part CMP-250906-148809-1, "RES Thin Film,  1kΩ, 0.1%, 0.1W, 25ppm/°C, 0805"
R3: library part CMP-03412-037118-1, "AC Series 0805 750 kO ±1% 0.125 W ±100 ppm/°C SMT Thick Film Chip Resistor", Manufacturer=Yageo, Manufacturer Part Number=AC0805FR-07750KL, Package=AC0805, Power Rating=1/8W, Resistance=750KΩ, Temperature="-55°C to +155°C", Temperature Range High=+155°C, Temperature Range Low=-55°C, Tolerance=0.01, Voltage Rating=150V, Automotive=Yes, Automotive Grade="Grade 0", Category=Res, ComponentLink2Description=Datasheet, ComponentLink2URL=http://www.yageo.com/documents/recent/PYu-AC_51_RoHS_L_6.pdf, Composition="Thick Film", Device Class L1="Passive Components", Device Class L2=Resistors, Device Class L3="Chip SMD Resistors", Digikey Description="AC Series 0805 750 kO ±1% 0.125 W ±100 ppm/°C SMT Thick Film Chip Resistor", Footprint Url=http://www.yageo.com/exep/pages/download/literatures/PYu-R_Mount_10.pdf, Height=0.6mm, Ipc Land Pattern Name=RESC200125X50, Lead Free=Yes, Octopart=https://octopart.com/ac0805fr-07750kl-yageo-26041180, RoHS=TRUE, Series=AC
R4: library part CMP-02407-006346-1, "RES Thick Film, 100kΩ, 1%, 0.125W, 100ppm/°C, 0805", Case/Package=0805, Max Operating Temperature=155°C, Max Power Dissipation=125mW, Min Operating Temperature=-55°C, Package Quantity=20000, Resistance=100kR, Temperature Coefficient=100ppm/°C, Tolerance=1%, Composition="Thick Film", Contact Plating=Tin, Depth=1.25mm, Features="Automotive AEC-Q200", Height=0.02inch, Lead Free="Lead Free", Length=0.079inch, Military Standard=Not, Number of Terminations=2, Packaging="Tape and Reel", Radiation Hardening=No, Width=0.049inch
R5: library part CMP-04015-036251-1, "10kΩ ±0.1% 0.125W, 1/8W Chip Resistor 1206 (3216 Metric) Moisture Resistant Thin Film", Case Code (Imperial)=1206, Case Code (Metric)=3216, Max Operating Temperature=125°C, Min Operating Temperature=-55°C, Power Rating=125mW, Resistance=10kR, Temperature Coefficient=10ppm/°C, Tolerance=0.1%, Voltage Rating=150V, Case/Package=1206, Composition="Thin Film", Height=0.6mm, Length=3.2mm, Packaging="Tape and Reel", Termination=SMD/SMT, Voltage Rating (DC)=150V, Weight=0.000571oz, Width=1.6mm
R6: library part CMP-2001-00901-1, Manufacturer=Yageo, Part Number=RC0805FR-07118KL
R7: library part CMP-1013-00515-1, "1K13 0.125W 1% 0805 (2012 Metric)  SMD", Case-EIA=0805, Case-Metric=2012, Power="0.125 W", Tolerance="1 %", Technology=SMT
R8 R9: library part CMP-02407-012725-1, "RES 5.1K OHM 1% 1/10W 0603", Case/Package=0603, Max Operating Temperature=155°C, Max Power Dissipation=100mW, Min Operating Temperature=-55°C, Resistance=5.1kR, Resistor Type="Thick Film", Temperature Coefficient=100ppm/°C, Tolerance=1%, Number of Terminations=2, Packaging="Tape and Reel", RoHS Compliant=Yes, Series=CRCW-C
R10 R11: library part CMP-03211-003506-1, "RES SMD 10KΩ 0.5% 1/16W 0603", Manufacturer="TE Connectivity", Manufacturer Part Number=CPF0603D10KE, Package=CPF0603, Power Rating=0.063W, Resistance=10KΩ, Temperature="-55°C to +155°C", Temperature Coefficient=25ppm/°C, Temperature Range High=+155°C, Temperature Range Low=-55°C, Tolerance=0.5%, Voltage Rating=50V, Automotive=No, Category=Res, ComponentLink2Description=Datasheet, ComponentLink2URL=https://www.te.com/commerce/DocumentDelivery/DDEController?Action=showdoc&DocId=Data+Sheet%7F1773200%7FM%7Fpdf%7FEnglish%7FENG_DS_1773200_M.pdf%7F3-1676481-2, Composition="Thin Film", Device Class L1="Passive Components", Device Class L2=Resistors, Device Class L3="Chip SMD Resistors", Height=0.55mm, Ipc Land Pattern Name=RESC15580X45, Lead Free=Yes, Octopart=https://octopart.com/cpf0603d10ke-te+connectivity-22737789, octopart_url=https://octopart.com/cpf0603d10ke-te+connectivity-22737789, Packaging="5k Reel", RoHS=TRUE, Series=CPF
R12 R15: library part CMP-250906-287647-1, "RES Thin Film,  4.7kΩ, 1%, 0.1W, 50ppm/°C, 0603"
R14 R19: library part CMP-02407-001090-1, "RES SMD 100 OHM 1% 1/8W 0603"
R21: library part CMP-1012-00736-1, "100K 0.1W 1% 0603 (1608 Metric)  SMD", Case-EIA=0603, Case-Metric=1608, Power="0.1 W", Tolerance="1 %", Technology=SMT
R22: library part CMP-02407-000288-1, "RES 1.05K OHM 0.5% 1/5W 0805", Case Code (Imperial)=0805, Case Code (Metric)=2012, Max Operating Temperature=155°C, Min Operating Temperature=-55°C, Power Rating=200mW, Resistance=1kR, Tolerance=0.1%, Voltage Rating=150V, Case/Package=0805, Composition="Thin Film", Height=0.52mm, Length=2mm, Packaging="Tape and Reel", Weight=0.000162oz, Width=1.25mm
SW1: library part CMP-1677-00002-1, "Tactile Switch, SPST-NO, 0.05 A, 5 to 24 V, -25 to 70 degC, 4-Pin THD, RoHS, Bulk", Capacitance="-45 f", Current Rating="1.5 A", Max Operating Temperature="70 degC", Min Operating Temperature="-40 degC", Package Quantity=1080, Voltage Rating="150 V", ComponentLink1Description="Manufacturer URL", ComponentLink1URL=http://www.omron.com/, ComponentLink2Description=Datasheet, ComponentLink2URL=http://www.omron.com/ecb/products/pdf/en-b3f.pdf, Contact Material=Brass, Contact Plating=Gold, DatasheetVersion=Jan-15, Gender=Female, Height="14.99 mm", Lead Pitch="1.27 mm", Length="18.34 mm", Mount="Through Hole", PackageDescription="4-Pin Through Hole Device, Body 6 x 6 mm", PackageReference=B3F-1000, Packaging=Tray, Pins=8, Radiation Hardening=No, RoHSCompliant=true, Shielding=Shielded, Width="25.4 mm"
U1: "Conv DC-DC 0.9V to 4.75V Synchronous Step Up Single-Out 2.5V to 5V 12-Pin UDFN EP T/R", Package=None, Check_prices=https://www.snapeda.com/parts/PAM2401/Zetex/view-part/?ref=eda, MF="Diodes Zetex", MP=PAM2401, SnapEDA_Link=https://www.snapeda.com/parts/PAM2401/Zetex/view-part/?ref=snap
U2: library part CMP-0321-00266-3, "IC LI-ION CHARGE/PWR MGMT 16QFN", Case/Package="VQFN EP", Max Operating Temperature=85°C, Max Power Dissipation=2.3W, Max Supply Voltage=6.4V, Min Input Voltage=4.3V, Min Operating Temperature=-40°C, Min Supply Voltage=4.35V, Operating Supply Current=1.5mA, Output Current=1.5A, Output Voltage=4.2V, Package Quantity=1, Contact Plating=Gold, Lead Free="Lead Free", Number of Cells=1, Number of Pins=16, Packaging="Tape and Reel", Radiation Hardening=No, RoHS Compliant=Yes, Series=-
U3: library part CMP-209535-000001-1, "LDO Voltage Regulators 1A, 3.3V", Dropout Voltage=1.1V, Manufacturer="Advanced Monolithic Systems", Max Junction Temp=+125°C, Max Power Dissipation=1.2W, Max Supply Voltage=15V, Nominal Supply Current=5mA, Output Current=1A, Output Voltage=3.3V, Package=AMS1117, Temperature="-40°C to +125°C", Temperature Range Low=-40°C, Automotive=No, Category=IC, ComponentLink2Description=Datasheet, ComponentLink2URL=http://www.advanced-monolithic.com/pdf/ds1117.pdf, Device Class L1="Integrated Circuits (ICs)", Device Class L2="Power Management ICs", Device Class L3="Voltage Regulators - Linear", Height=1.8mm, Ipc Land Pattern Name=SOT229P700X180-4, Lead Free=Yes, Manufacturer Part Number=AMS1117-3.3, Number Of Outputs=1, Octopart=https://octopart.com/ams1117-3.3-advanced+monolithic+systems-25899300, Output Type=Fixed, RoHS=TRUE, Standoff Height=0.64mm, Temperature Range High=+125°C
U4: "USB to serial chip CH340", Package=None, Availability="Not in stock", Check_prices=https://www.snapeda.com/parts/CH340C/WCH/view-part/?ref=eda, MF=WCH, MP=CH340C, Price=None, SnapEDA_Link=https://www.snapeda.com/parts/CH340C/WCH/view-part/?ref=snap
U5: "Bluetooth, WiFi 802.11b/g/n, Bluetooth v4.2 +EDR Transceiver Module 2.4GHz ~ 2.5GHz PCB Trace Surface Mount", Package="SMD-38 Espressif Systems", Check_prices=https://www.snapeda.com/parts/ESP32-WROVER-E-N4R8/Espressif+Systems/view-part/?ref=eda, MF="Espressif Systems", MP=ESP32-WROVER-E-N4R8, SnapEDA_Link=https://www.snapeda.com/parts/ESP32-WROVER-E-N4R8/Espressif+Systems/view-part/?ref=snap
U6: "Tiny, Low-Cost, PCM Class D Amplifier with Class AB Performance", Package="TQFN-16 Maxim", Check_prices=https://www.snapeda.com/parts/MAX98357AETE+T/Analog+Devices/view-part/?ref=eda, MF="Analog Devices", MP=MAX98357AETE+T, SnapEDA_Link=https://www.snapeda.com/parts/MAX98357AETE+T/Analog+Devices/view-part/?ref=snap

## Free pads (board coordinates)
  round 126 hole 126 unplated: 3(115,3823) 4(1864,3831) 5(1862,112) 6(119,112)

## Via types
v1: diameter 24, hole 6, Top Layer to Bottom Layer, 104 vias

## Nets (pads, with @x,y where several pads share a name; then routed paths per layer and width w, separated by ;. In a path a pad name is that pad's centre, name@x,y a point inside that pad or via, vN(x,y) a via of type N, cw(c..) or ccw(c..) an arc to the next point about the centre after c; other vN are vias at no path point)
CAM_HREF: J2.16 U5.37 | length 1681.6
  Top Layer w6: J2.16 1065.68,2351.57 1065.68,3191.49 1077,3202.81 v1(1077,3204) ; v1(1208,3840) 1334,3840 U5.37
  Bottom Layer w6: v1(1077,3204) 1077,3208.87 1066.61,3219.26 1066.61,3229.89 1066.61,3232.25 1206.39,3382.2 1208,3383.93 v1(1208,3840)
CAM_PCLK: J2.12 U5.36 | length 1762.7
  Top Layer w6: v1(906,3357) 906,2573 986.51,2492.49 986.51,2488.51 986.16,2488.16 J2.12 ; v1(1173,3775) 1174.28,3776.28 1320.28,3776.28 U5.36
  Bottom Layer w6: v1(906,3357) 950,3357 1173,3580 v1(1173,3775)
CAM_VSYNC: J2.18 U5.10 | length 1435.8
  Top Layer w6: U5.10 648.02,3439 v1(719,3439) ; v1(917,3436) 1104.27,3248.73 J2.18
  Bottom Layer w6: v1(719,3439) 720.5,3437.5 915.5,3437.5 v1(917,3436)
CAM_XCLK: J2.14 Q2.3 U5.25 | length 3359
  Top Layer w6: v1(964,3035) 962,3033 962,2598 1024.75,2535.25 1024.75,2351.57 J2.14 1025.53,2012.47 1173,1865 v1(1173,1706) ; Q2.3 Q2.3@1178,341.76 ; v1(1207.23,3038) 1206,3039.23 1206,3161 1286,3241 U5.25
  Top Layer w10: v1(1173,1616) 1173,1446 1208,1411 1208,1114 v1(1209,1113) ; Q2.3@1178,341.76 v1(1178,402)
  Bottom Layer w6: v1(964,3035) 965.5,3036.5 1205.73,3036.5 v1(1207.23,3038)
  Bottom Layer w10: v1(1173,1616) v1(1173,1706) ; v1(1178,402) 1178,443 1156,465 1156,946 1209,999 v1(1209,1113)
CAM_Y2: J2.1 U5.8 | length 1275.6
  Top Layer w6: U5.8 701.63,3541 742.79,3499.84 742.79,3499.45 771.62,3470.61 771.62,2586.17 769.62,2584.17 J2.1
CAM_Y3: J2.3 U5.7 | length 1334.6
  Top Layer w6: U5.7 692,3591 787.62,3495.38 787.62,2459.38 808.21,2438.79 808.21,2351.57 J2.3
CAM_Y4: J2.5 U5.6 | length 1399.8
  Top Layer w6: U5.6 690,3641 805,3526 805,2479 847.58,2436.42 847.58,2371.41 848.36,2370.63 J2.5
CAM_Y5: J2.7 U5.5 | length 1465.5
  Top Layer w6: U5.5 689,3691 826,3554 826,2509 887.73,2447.27 J2.7
CAM_Y6: J2.9 U5.4 | length 1534.7
  Top Layer w6: U5.4 694,3741 842,3593 842,2542 927.1,2456.9 J2.9
CAM_Y7: J2.11 U5.31 | length 1658.8
  Top Layer w6: J2.11 966.47,2463.53 863,2567 863,3462.03 888.23,3487.26 1009.26,3487.26 1063,3541 U5.31
CAM_Y8: J2.13 U5.30 | length 1454.4
  Top Layer w6: v1(987,3263) 934,3210 934,2592 1005.06,2520.94 1005.06,2351.57 J2.13 ; v1(1128,3486) 1330,3486 U5.30
  Bottom Layer w6: v1(987,3263) 1128,3404 v1(1128,3486)
CAM_Y9: J2.15 U5.29 | length 1310.4
  Top Layer w6: v1(1042,3239) 1043,3238 1043,3205.94 1044.43,2379.79 1044.43,2371.41 J2.15 ; v1(1161,3435) 1329,3435 U5.29
  Bottom Layer w6: v1(1042,3239) 1042,3274 1161,3393 v1(1161,3435)
GND: C2.2 C3.2 C4.1 C5.2 C6.2 C7.1 C8.1 C9.1 C10.2 C11.2 C12.2 D7.1 J1.A1_B12 J1.B1_A12 J1.S1 J1.S2 J1.S3 J1.S4 J2.2 J2.4 J2.6 J2.8 J2.10 J2.17 J2.23 J2.24 J4.1 M1.4 M1.5 M1.6 M1.9 P1.2 P3.3 R4.1 R5.2 R6.1 R7.1 R8.1 R9.1 R19.1 SW1.3 U1.4 U1.8 U2.6 U2.8 U2.14 U2.17 U3.1 U4.1 U5.1 U5.15 U5.38 U5.39_1 U5.39_2 U5.39_3 U5.39_4 U5.39_5 U5.39_6 U5.39_7 U5.39_8 U5.39_9 U6.2 U6.3 U6.11 U6.15 U6.17 | length 4154.2
  Top Layer w6: v1(385,2573) 399.53,2587.53 U2.8 ; v1(876.34,3583.91) 897.43,3605 910.37,3605 v1(931.46,3583.91)
  Top Layer w8: R6.1 253.5,2594.5 280.03,2567.97 U2.14@315.89,2567.97 ; U2.14@315.89,2568 U2.17@356,2568 ; U6.3 360.16,644.84 v1(361,644) ; U6.17 378,627 v1(378,626) ; U6.11 U6.17@379.84,625.16 ; U6.2 379.84,644.84 U6.15 ; v1(385,2543) 390.32,2548.32 U2.6@424,2548.32 ; C8.1@1283.47,476 C8.1
  Top Layer w10: v1(169,2705) 169,2744 C4.1 ; R7.1 175,2507.46 R6.1 ; U3.1@612.12,541 U3.1 ; v1(789,2408) 789.31,2407.69 J2.2 ; v1(828,2408) 828.68,2407.32 J2.4 ; v1(867,2408) 868.05,2406.95 J2.6 ; J2.8 907.42,2407.42 v1(908,2408) ; J2.10 946.79,2406.79 v1(947,2407) ; J2.17 1084.58,2411.58 v1(1085,2412) ; J2.23 1202.69,2402.9 v1@1213,2413.21 ; v1(1213,2417) v1@1213,2413.21 ; J2.24 1222.38,2403.83 v1@1213,2413.21 ; v1(1485,2570) 1488.79,2570 1505.62,2586.83 1541.09,2586.83 M1.9 ; M1.6 1543.64,2739.64 1561,2757 1596,2757 ; M1.5 1596,2757 ; v1(1596,2784) 1596,2757 ; M1.4 1648.36,2741.64 1633,2757 1596,2757
  Top Layer w15: v1(302,1646) 339.24,1646 339.61,1646.37 U1.4 ; C3.2 338.3,2333.3 417.7,2333.3 v1(418,2333) 495.4,2333 C6.2 ; U1.8 v1@452.42,1469.42 ; R8.1 1392.47,369.47 v1(1434,411) 1435.87,411 1484,459.13 R9.1
  Top Layer w20: D7.1 298.32,3531.68 v1(299,3531) ; v1(267,3845) 267.26,3845.26 334.74,3845.26 C11.2 357.97,3845.53 403.44,3891 U5.1 ; v1(272,1832) C5.2 ; v1@452.42,1469.42 v1(453,1470) ; C2.2@516.35,1325.3 516.35,1291.35 452.37,1227.37 R4.1 452.58,1157.21 885.84,1157.21 SW1.3 ; R19.1 539,2814.28 v1(539,2738) 539,2670.02 R5.2 ; v1(553,541) U3.1@612.12,541 ; v1(575,3190) 575.5,3190.5 645.52,3190.5 U5.15 ; v1(920.77,274.77) 983.63,274.77 C9.1 ; P3.3 1087,1816.83 P3.3@1094.03,1809.8 ; U4.1 1224,558.3 1223.5,557.8 1223.5,491.58 1230,485.08 v1(1230,484) 1231.08,484 1239.8,475.28 1282.75,475.28 C8.1@1283.47,476 ; U5.38 1413.92,3891 1414.92,3892 v1(1416,3892) ; C10.2 1502.77,2972.71 1502.77,3050.23 v1(1502,3051) 1502,3052.08 1514.76,3064.84 C12.2 ; C7.1 1582.43,132.98 1721.71,272.26 J1.S1 1708.13,363.5 1701,370.63 1701,395 ; J1.B1_A12@1704,670 1704,696.93 1711.13,704.06 J1.S2
  other v1: 356,2544 356,2573 876.34,3528.8 931.46,3528.8 986.57,3528.8 986.57,3583.91 876.34,3639.03 931.46,3639.03 986.57,3639.03
I2C_SCL: J2.22 R15.2 U5.27 | length 1309.1
  Top Layer w6: J2.22 1182.23,2351.57 1182.23,2379.79 1182.23,3232.47 1182.23,3234.71 1183.7,3236.41 1271.22,3337.09 1271.37,3337.24 1273.13,3339 1333,3339 U5.27 U5.27@1337.01,3343.01 ; R15.2@1507.38,3448.02 R15.2
  Top Layer w10: U5.27@1337.01,3343.01 1370.01,3343.01 1475.02,3448.02 R15.2@1507.38,3448.02
I2C_SDA: J2.20 R12.2 U5.26 | length 1265.5
  Top Layer w6: v1(1142,3188) 1143.64,3186.36 J2.20 ; v1(1230,3237) 1284,3291 U5.26 U5.26@1336,3290 ; R12.2 R12.2@1513.36,3295
  Top Layer w10: U5.26@1336,3290 R12.2
  Bottom Layer w6: v1(1142,3188) 1200,3188 1228.15,3216.15 1228.15,3235.15 v1(1230,3237)
NetC1_1: C1.1 C2.1 R3.1 U1.7 | length 720.3
  Top Layer w10: R3.1 364.66,1549.34 391,1523 390.8,1522.8 U1.7 390.8,1420.8 280.69,1310.69 280.69,1282.25 C1.1 340,1273 401,1334 C2.1@466,1334
NetC1_2: C1.2 C9.2 J4.3 P3.1 R3.2 R4.2 R21.2 U1.5 U3.3 U6.7 U6.8 | length 4654.5
  Top Layer w6: R21.2 201,699 274,626 ; U6.8 280.04,605.47 277.02,608.49 ; U6.7 312.66,626 274,626 ; U3.3 614,359.12 614,321 489.93,196.93 356.07,196.93 239,314 239,587 263.51,611.51 274,611.51 277.02,608.49 ; 274,626 277.02,622.98 277.02,608.49
  Top Layer w10: R21.2 202,935 202,1085.07 273.93,1157 ; R3.2 336.86,1466.66 U1.5 339.61,1471.1 U1.5@342.03,1473.51 ; R3.2@210,1464.66 200.57,1455.23 C1.2 200.57,1226.5 270.07,1157 273.93,1157 ; R4.2 273.93,1157 ; U3.3 C9.2@1011.26,360.84
  Top Layer w20: R4.2 366.97,1154.35 366.97,1096.03 413,1050 863,1050 947,1134 947,1393 887,1453 P3.1 1062,1649 1386.15,1649 J4.3
NetC3_1: C3.1 P1.1 U2.2 U2.3 | length 475.5
  Top Layer w8: C3.1 338,2445 344,2451 355.41,2451 360.1,2455.69 360.1,2466 ; U2.2@360.1,2504.1 360.1,2466 ; U2.3@379.79,2504.1 379.79,2470.69 375.1,2466 360.1,2466
  Top Layer w20: P1.1 270.46,2352.67 326.19,2408.4 C3.1
NetC4_2: C4.2 C5.1 L1.1 R1.2 R2.2 U1.3 U2.10 U2.11 | length 2591.1
  Top Layer w8: C4.2 171,2793 182,2782 222,2782 360.1,2643.9 ; v1(329,2708) 375.31,2661.69 375.31,2643.9 ; U2.11@360.1,2612.21 360.1,2643.9 ; U2.10@379.79,2612.21 380,2612.43 380,2639.21 375.31,2643.9 ; 360.1,2643.9 375.31,2643.9
  Top Layer w10: C4.2 157.2,2820.8 125,2853 125,3137 146.9,3158.9 R2.2 422.55,3158.9 R1.2 ; v1(311.82,2284) 326.19,2284 439.99,2170.2 439.99,1892.15 388.1,1840.27 C5.1 ; U1.3 365.2,1741.2 390,1766 390,1830.1 C5.1 ; L1.1 520.79,1773.12 461.91,1832 C5.1
  Bottom Layer w10: v1(311.82,2284) 220,2375.82 220,2687 241,2708 v1(329,2708)
NetC6_1: C6.1 J1.A4_B9 J1.B4_A9 U2.5 U2.13 | length 3243.7
  Top Layer w8: v1(254,2637) 272.12,2618.88 272.12,2602.75 287.18,2587.69 U2.13@315.89,2587.69 ; U2.5@424,2528.63 455.37,2528.63 v1(498,2486) ; v1@1649,650.69 v1(1649,658) ; J1.A4_B9 1704.56,444.98 1732.98,444.98 1763,475 1763,589.06 1729.25,622.8 1705.68,622.8 J1.B4_A9@1699.99,628.49
  Top Layer w10: C6.1 v1(498,2486) 542,2442 542,2043 v1(686,1899) ; v1@1649,650.69 1665.55,634.14 J1.B4_A9@1694.35,634.14
  Bottom Layer w8: v1(254,2637) 418,2637 465,2590 465,2519 v1(498,2486)
  Bottom Layer w10: v1(686,1899) 1649,936 v1(1649,658)
NetC11_1: C11.1 Q1.3 R14.1 U5.3 | length 4514.3
  Top Layer w6: C11.1 C11.1@335.53,3787
  Top Layer w10: C11.1@335.53,3787 379,3787 462.02,3703.98 511.3,3703.98 R14.1 ; R14.1@515.94,3701.28 527.94,3713.29 527.94,3715.22 603.73,3791.02 U5.3 ; Q1.3 1356.83,127.3 1409.7,127.3 v1(1411,126)
  Bottom Layer w10: v1(580,3769) 580,3433 519,3372 519,3172 575,3116 575,1928 775,1728 775,1343 1116,1002 1116,358 1348,126 v1(1411,126)
NetD1_1: D1.1 U2.7 | length 264.3
  Top Layer w8: D1.1 415,2695.86 453.08,2657.78 453.08,2578.08 443,2568 U2.7@424,2568
NetD1_2: D1.2 R1.1 | length 210.3
  Top Layer w10: D1.2 416,2877 416,3074.55 R1.1
NetD2_1: D2.1 U2.9 | length 228.9
  Top Layer w8: D2.1 399.47,2677.85 U2.9@399.47,2612.21
NetD2_2: D2.2 R2.1 | length 237
  Top Layer w10: R2.1 214,3019 284,2949 D2.2
NetD7_2: D7.2 R22.2 | length 176.4
  Top Layer w10: D7.2@240,3440.66 249.34,3450 R22.2
NetJ1_A5: J1.A5 R8.2 | length 309
  Top Layer w10: R8.2@1453,335 1469,335 1618.79,484.79 J1.A5@1699.99,484.79
NetJ1_B5: J1.B5 R9.2 | length 363.1
  Top Layer w6: R9.2@1424,467.94 R9.2
  Top Layer w10: R9.2@1424,467.94 v1(1424,519) ; v1(1650.09,599.09) 1652.77,601.77 1671.82,601.77 1672.17,602.12 1682.55,602.12 1683.33,602.9 J1.B5@1699.99,602.9
  Bottom Layer w10: v1(1424,519) 1503,598 1649,598 v1(1650.09,599.09)
NetJ4_2: J4.2 U5.24 | length 1793.5
  Top Layer w20: U5.24 1339.57,3186.43 1385.57,3186.43 1413,3159 1413,2434 1599.57,2247.43 J4.2
NetL1_2: L1.2 U1.1 | length 161.3
  Top Layer w10: U1.1 416.39,1648.13 419.26,1651 451,1651 461,1661 568.12,1661 L1.2
NetM1_1: M1.1 U5.13 U6.16 | length 4992.1
  Top Layer w10: v1(229,3290) 229.5,3289.5 574.5,3289.5 v1(575,3289) 577,3291 U5.13 ; v1(240,1072) 499,813 499,701 462.53,664.53 U6.16 ; M1.1 1739.38,2589.38 1755,2605 1755,2636 v1(1754,2637)
  Bottom Layer w10: v1(229,3290) 110,3171 110,1202 v1(240,1072) ; v1(575,3289) 577,3291 691.14,3291 827.14,3155 1265,3155 1446.74,2973.26 1572.26,2973.26 1754,2791.53 v1(1754,2637)
NetM1_2: M1.2 U5.16 | length 1629.4
  Top Layer w10: U5.16 704,3141 728,3117 728,2630.38 v1(726.62,2629) ; M1.2 1648.5,2630.86 1703.86,2630.86 v1(1704,2631)
  Bottom Layer w10: v1(726.62,2629) 744.62,2611 1684,2611 v1(1704,2631)
NetM1_3: M1.3 U5.23 U6.14 | length 4091.6
  Top Layer w6: U6.14 528.16,625.16 992,1089 1632,1089 1806,1263 1806,2631.11 1765.06,2672.06 M1.3
  Top Layer w10: U5.23 1291,3141 1267,3117 1267,2879 1323,2823 v1(1364,2823) ; M1.3 1652.3,2672.06 1688,2707.76 1688,2781 v1(1658,2811)
  Bottom Layer w10: v1(1364,2823) 1642.21,2823 1654.21,2811 v1(1658,2811)
NetP3_2: P3.2 U5.9 | length 2013.4
  Top Layer w10: U5.9 715,3491 753.62,3452.38 753.62,2593.62 600,2440 600,2147 627,2120 681,2120 977,1824 P3.2
NetQ1_1: Q1.1 R10.1 | length 131.1
  Top Layer w10: R10.1 1182.29,110.86 1198.86,110.86 1250.03,162.03 1272.03,162.03 Q1.1
NetQ1_2: Q1.2 R11.1 U4.13 | length 1211.4
  Top Layer w10: v1(927,97) 990.4,97 991,97.6 1028.6,60 1209,60 1240.2,91.2 Q1.2 ; v1(936,710) U4.13
  Bottom Layer w10: v1(927,97) 786,238 786,609 887,710 v1(936,710)
NetQ2_1: Q2.1 R11.2 | length 186.2
  Top Layer w10: R11.2 1022.43,170.43 1107.38,255.38 1133.74,255.38 Q2.1
NetQ2_2: Q2.2 R10.2 U4.14 | length 746.8
  Top Layer w10: v1(935,659) 935.5,659.5 1006.96,659.5 U4.14 ; v1(1091,298) 1177.64,298 1203.65,271.98 1207.59,271.98 1214.4,265.17 Q2.2 1214.4,215.8 1172,173.4 R10.2
  Bottom Layer w10: v1(935,659) 935,519 1091,363 v1(1091,298)
NetR5_1: R5.1 U2.1 | length 409.2
  Top Layer w8: v1(293,2457) 296.06,2460.06 319.89,2460.06 340.42,2480.58 U2.1@340.42,2504.1 ; R5.1 R5.1@548,2538.98
  Top Layer w10: v1(548,2486) R5.1@548,2538.98
  Bottom Layer w8: v1(293,2457) 519,2457 v1(548,2486)
NetR6_2: R6.2 U2.12 | length 201.5
  Top Layer w8: R6.2 226.44,2657.5 231.94,2663 310.54,2663 341,2632.54 341,2632 340.69,2631.69 340.69,2612.49 U2.12@340.42,2612.21
NetR7_2: R7.2 U2.16 | length 178.8
  Top Layer w8: R7.2 182.86,2439.54 271.32,2528 276,2528 276.63,2528.63 U2.16@315.89,2528.63
NetR19_2: R19.2 U5.14 U6.1 | length 2948
  Top Layer w5: R19.2 R19.2@535.28,2876
  Top Layer w6: U6.1 399.76,691.73 399.76,772.76 v1(400,773)
  Top Layer w10: R19.2@535.28,2876 565,2876 603,2838 603,2488 567,2452 567,2081 758,1890 v1(758,1306.05)
  Top Layer w20: R19.2 533.06,2875.72 526.06,2882.72 526.06,2884.66 513,2897.72 513,3184 562.28,3233.28 638.31,3233.28 U5.14
  Bottom Layer w10: v1(400,773) 758,1131 v1(758,1306.05)
NetR21_1: R21.1 U6.4 | length 274.2
  Top Layer w6: R21.1 263.99,821.01 340.47,744.53 U6.4
NetR22_1: R22.1 U5.11 | length 177
  Top Layer w10: R22.1 537,3450 592,3395 642.02,3395 U5.11
NetSW1_1: SW1.1 U5.12 | length 2237.5
  Top Layer w10: v1(574,3342) 645.02,3342 U5.12 ; v1(820,1396) 822.68,1393.32 827.31,1393.32 SW1.1
  Bottom Layer w10: v1(574,3342) 543,3311 543,3177 595,3125 595,1938 795,1738 795,1421 v1(820,1396)
NetU4_2: U4.2 U5.34 | length 3697.7
  Top Layer w10: U4.2 1224.5,609.5 1281.5,609.5 v1(1282,609) ; U5.34 1346,3680 1548,3680 1844.14,3383.86 1844.14,1257.14 v1@1362,775
  Bottom Layer w10: v1(1282,609) 1360,687 v1(1360,771)
  other v1: 1404,3680
NetU4_3: U4.3 U5.35 | length 3767.8
  Top Layer w10: U4.3 1227.71,656.29 1257.71,656.29 1264.41,649.59 1281.41,649.59 v1(1282,649) ; U5.35 1337,3743 v1(1400,3743) 1515,3743 1865,3393 1865,1249 v1(1474,858)
  Bottom Layer w10: v1(1282,649) 1327,694 1327,786 1364.96,823.96 1439.96,823.96 v1(1474,858)
OUT_N: P2.2 U6.10 | length 367
  Top Layer w10: U6.10 360.79,578.5 360.79,556.53 358.32,554.06 358.32,469 428,399.32 428,283 453.54,257.46 P2.2
OUT_P: P2.1 U6.9 | length 368.7
  Top Layer w10: U6.9 340.47,555.9 342.32,554.06 342.32,462.37 412,392.69 412,281.94 406.14,276.08 398.25,276.08 P2.1
USB_N: C7.2 C8.2 C10.1 C12.1 J1.A7 J1.B7 J2.19 J2.21 M1.7 M1.8 R12.1 R14.2 R15.1 U3.2 U3.4 U4.4 U4.6 U4.16 U5.2 | length 8053.5
  Top Layer w6: R14.2 R14.2@515.94,3758.72 ; 1163.32,2313 J2.21
  Top Layer w8: J2.19 v1(1124,2462) v1(1124,2462) ; v1(1163,2461) 1163.32,2460.68 J2.21
  Top Layer w10: R14.2@515.94,3758.72 598.22,3841 U5.2 ; U3.2 U3.4 871.72,493.87 939.85,562 1005.46,562 U4.16 1054,560 1080,586 1080,730.56 1106.22,756.78 1130.22,756.78 ; 1163.32,2313 1163.32,2230.8 1553,1841.12 1553,1497.17 1527.83,1472 1480,1472 1396.74,1388.74 1396.74,1257.74 v1(1341,1202) ; v1@1272,2582 v1@1272,2650 ; v1(1343,984) 1343,874 1279,810 U4.6 1220.29,806.29 1179.74,806.29 1130.22,756.78 ; C8.2 1352,471.47 v1(1352,598) ; C8.2@1354.97,469 1354.97,289.58 1511.57,132.98 C7.2 ; v1@1454.72,2886.72 1498.66,2886.72 1552.14,2940.21 C10.1@1552.14,2959.62 ; J1.B7@1699.99,504.47 1634.1,504.47 1542.57,596 v1(1462,596) 1444,578 1372,578 v1(1352,598) ; J1.A7@1699.99,543.84 1670.12,543.84 1666.43,547.53 1640.85,547.53 1461.37,727 1250.65,727 1244.79,721.14 1244.79,717.2 U4.4@1237.58,710 ; 1130.22,756.78 1174.29,712.71 1221.29,712.71 U4.4 U4.4@1237.58,710 ; U4.4@1237.58,710 1243.86,703.72 1255.14,703.72 1283.86,675 1320,675 1352,643 v1(1352,598)
  Top Layer w15: v1(1271,2651) v1@1272,2650 ; v1@1272,2582 v1(1273,2581) ; v1(1453,2885) v1@1454.72,2886.72 ; M1.8 1497.32,2630.72 1488.54,2639.5 1488.54,2654 ; M1.7 1497.32,2672.06 1488.54,2663.27 1488.54,2654 ; C10.1@1552.14,2959.62 C10.1 ; C10.1@1564.51,2971 1576.7,2958.81 1576.7,2957.83 1591,2943.53 1591,2900 1450,2759 1450,2670 1466,2654 1488.54,2654
  Top Layer w20: U5.2 714,3841 845,3710 v1(1243,3710) ; C12.1 C12.1@1562.82,3129.82 ; C10.1@1562.82,2977.2 C12.1@1562.82,3129.82 ; v1(1620,3454) 1619.5,3453.5 1568.14,3453.5 R15.1 1565.64,3451 1565.64,3292 R12.1 1562.82,3289.18 C12.1@1562.82,3129.82
  Bottom Layer w8: v1(1124,2462) 1124.5,2461.5 1162.5,2461.5 v1(1163,2461) 1202,2461 1273,2532 v1(1273,2581)
  Bottom Layer w10: v1(1271,2651) 1271,2804 1352,2885 v1(1453,2885) ; v1(1341,1202) 1342,1201 1342,985 v1(1343,984)
  Bottom Layer w20: v1(1243,3710) 1451,3710 1620,3541 v1(1620,3454)
USB_P: J1.A6 J1.B6 U4.5 | length 1170.8
  Top Layer w10: U4.5 U4.5@1237.58,760 ; v1(1286,775) 1252.58,775 U4.5@1237.58,760 ; v1(1294.5,703.5) 1298.28,703.5 1304.69,697.09 1464.33,697.09 1637.27,524.16 J1.A6@1699.99,524.16 ; J1.B6@1699.99,563.53 1699.99,564.75 1671.34,564.75 1670.12,563.53 1647.47,563.53 1468,743 1250.65,743 1244.79,748.86 1244.79,752.8 U4.5@1237.58,760
  Bottom Layer w10: v1(1286,775) 1286,715.78 1294.5,707.28 v1(1294.5,703.5)
pads on no net: J1. J1.A8 J1.B8 J2.M1 J2.M2 M1. SW1.2 SW1.4 U1.2 U1.6 U2.4 U2.15 U4.7 U4.8 U4.9 U4.10 U4.11 U4.12 U4.15 U5.17 U5.18 U5.19 U5.20 U5.21 U5.22 U5.28 U5.32 U5.33 U5.40 U5.41 U5.42 U5.43 U5.44 U5.45 U5.46 U5.47 U5.48 U5.49 U5.50 U5.51 U6.5 U6.6 U6.12 U6.13

## Polygon pours and split planes (outlines as drawn)
GND on Bottom Layer "NONET_L02_P-001" (none, remove dead copper, pour order 1): 3,3935 4,3934 4,4 141,4 143,2 145,4 1965,4 1965,3933 1963,3935

## Other copper
Top Layer:
  text "+" at 359,2105 h60
  text "-" at 359,2023.01 h60
  text "GND" at 1722,1256 h60 r90
  text "+5V" at 1526,1252 h60 r90
  text "FLSH" at 1624,1198 h60 r90
  text "+" at 269,337 h60

## Text inside footprints (layer, text, board x,y; h text height)
J1: Top 3D Body "PCB EDGE" at 1960.68,738.5 h24 r90